# Altium PCB Sinalização.PcbDoc
Units mm, origin at the board's own origin, x right, y up, seen from the top; angles counter-clockwise.
Board outline 60.07 x 120.27 mm, 2 copper layers (Top Layer, Bottom Layer); 21 components, 23 nets, 104 pads, 4 vias.
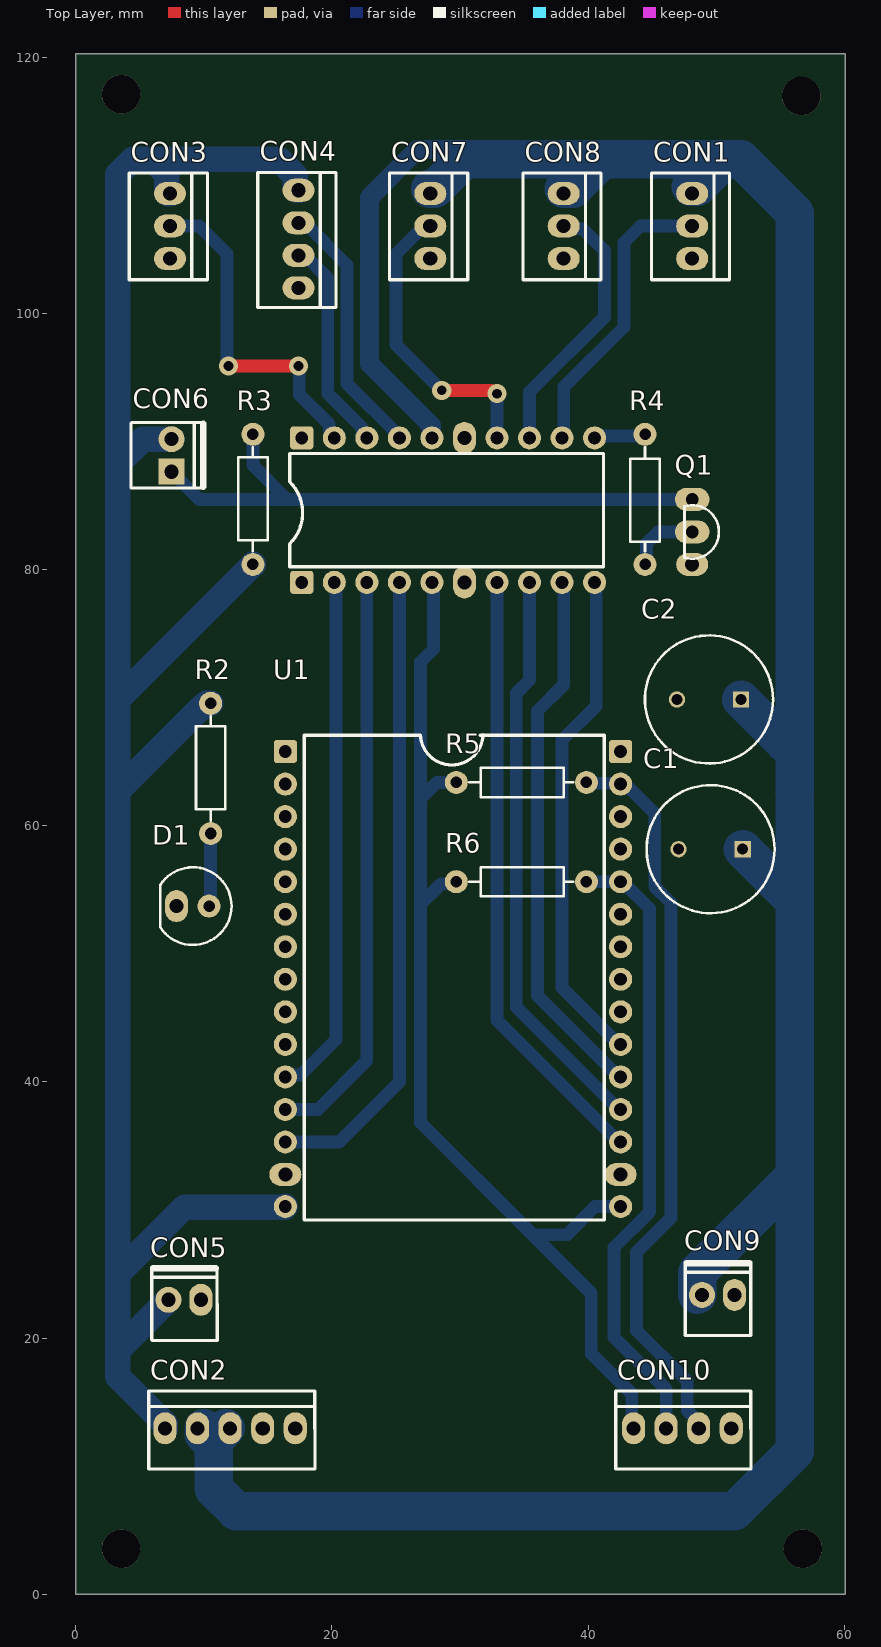
[diagram p0: Top Layer view]
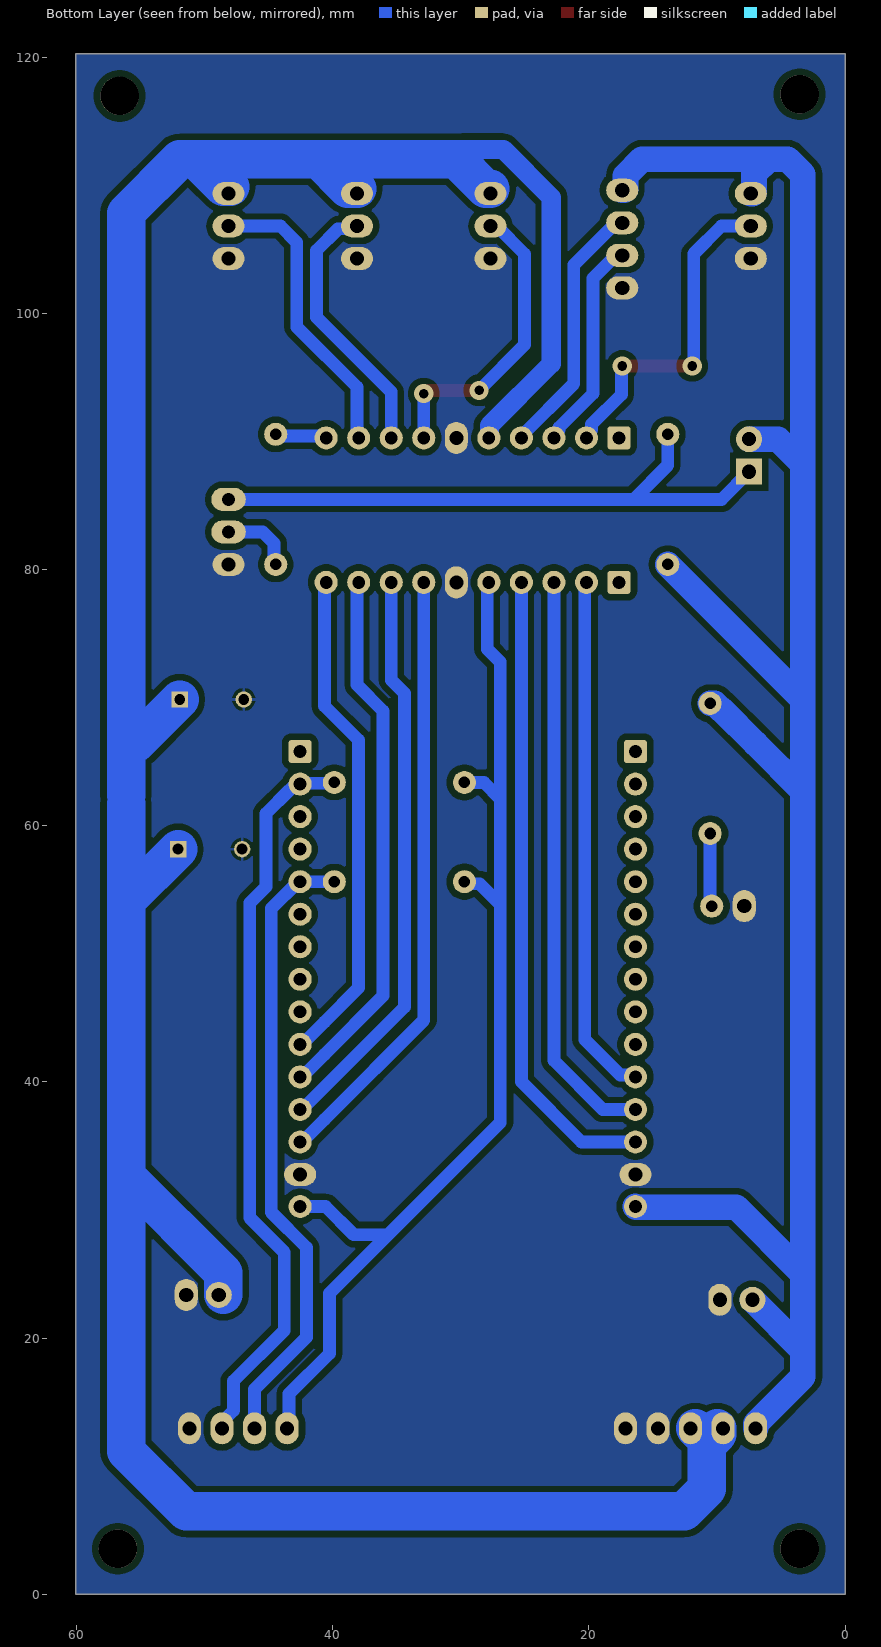
[diagram p1: Bottom Layer view, seen from below]

## Layer stack, top to bottom
Top Solder: solder mask 0.0102, Solder Resist, Dk 3.5
Top Layer: signal copper 0.0356
Dielectric 1: dielectric 0.32, FR-4, Dk 4.8
Bottom Layer: signal copper 0.0356
Bottom Solder: solder mask 0.0102, Solder Resist, Dk 3.5

## Board outline
0,0 60.071,0 60.071,120.269 0,120.269

## Design rules (kind name [scope] priority, off if disabled: settings)
Clearance [All] p1: gap=0.5 ignorepadtopadclearanceinfootprint=FALSE except(0: Arc-Text Arc-Hole Track-Text Track-Hole SMDPad-Text SMDPad-Hole THPad-Text THPad-Hole Via-Text Via-Hole Fill-Text Fill-Hole Poly-Text Poly-Hole Region-Text Region-Hole Text-Text Text-Hole)
ComponentClearance [All] p1: gap=0.3 collisioncheckmode=3 verticalgap=0.254 showdistances=FALSE
HoleSize [All] p1: absolutevalues=TRUE maxlimit=3 minlimit=0.75 maxpercent=80.000 minpercent=20.000
HoleToHoleClearance [All] p1: gap=0.1 allowstackedmicrovias=TRUE
MinimumSolderMaskSliver [All] p1: minsoldermaskwidth=0.05
PolygonConnect [All] p1: connectstyle=Relief reliefconductorwidth=0.254 reliefentries=4 polygonreliefangle="90 Angle" airgapwidth=0.254
RoutingVias [All] p1: holewidth=0.9 width=2 viastyle="Through Hole" minholewidth=0.9 minwidth=2 maxholewidth=0.9 maxwidth=2
SilkToSilkClearance [All] p1: silktosilkclearance=0
SilkToSolderMaskClearance [IsPad] p1: minsilkscreentomaskgap=0 clearancetoexposedcopper=TRUE
SolderMaskExpansion [All] p1: expansion=0.102 istentingtop=FALSE
Width [All] p1: maxlimit=3 minlimit=0.8 preferedwidth=1 minimp=50.000000 maximp=50.000000 favimp=50.000000
24 further rules are at their usual default settings.

## Components (designator, comment, footprint, x,y, rotation, side; value= is the part's Value field where it differs from the comment)
C1 "Cap. Elet. 470 uF 16V" "Cap. Elet. 470uF 16V" 52.07,58.166 r180 top
C2 "Cap. Elet. 470 uF 16V" "Cap. Elet. 470uF 16V" 51.943,69.85 r180 top
CON1 "KK_2.54_3vias" KK_3vias_180º 48.133,104.267 r90 top
CON2 "KK_2.54_5vias" KK_5vias_180° 17.145,12.954 r180 top
CON3 "KK_2.54_3vias" KK_3vias_180º 7.366,104.267 r90 top
CON4 "KK_2.54_4vias" KK_4vias_180° 17.399,101.981 r90 top
CON5 "KK_2.54_2vias" KK_2VIAS_180º#1 9.779,22.987 r180 top
CON6 "KK_2.54_2vias" KK_2VIAS_180º#2 7.493,87.63 r90 top
CON7 "KK_2.54_3vias" KK_3vias_180º 27.686,104.267 r90 top
CON8 "KK_2.54_3vias" KK_3vias_180º 38.1,104.267 r90 top
CON9 "KK_2.54_2vias" KK_2VIAS_180º#1 51.435,23.368 r180 top
CON10 "KK_2.54_4vias" KK_4vias_180° 51.181,12.954 r180 top
D1 "LED 5MM RED" "LED 5MM RED" 9.144,53.721 r180 top
Q1 "BC549" TO92 48.133,82.931 r270 top
R2 "RES 470R 1/4W CARBON FILM" "RES 470R 1/4W CARBON FILM" 10.541,64.467 r90 top
R3 "RES 1/4W CARBON FILM" "RES 10K 1/4W CARBON FILM" 13.843,85.471 r90 top
R4 "RES 1/4W CARBON FILM" "RES 10K 1/4W CARBON FILM" 44.45,85.471 r270 top
R5 "4.7K" "RES 4.7K 1/4W CARBON FILM" 34.798,63.373 r0 top
R6 "4.7K" "RES 4.7K 1/4W CARBON FILM" 34.798,55.626 r0 top
U1 "microcontrolador" ESP32_Desvikit_v1 16.37,65.786 r0 top value="ESP32 Desvikit V1"
? "Conversor de nível logico" "Conversor de nível lógico" 17.653,79.019 r90 top

## Footprints (in the part's own frame and the unit in brackets; to place one, negate y for a bottom-side part, rotate by r counter-clockwise, add the part's x,y. Pads: shape width x height; smd on the part's side, far side on the other; paste and mask are expansions set on the pad)
"Cap. Elet. 470uF 16V" [mm]
  rect 1.275x1.275 hole 0.85: 1(0,0)
  round 1.275 hole 0.85: 2(5,0)
  silkscreen extent -2.5,-5 7.5,5, body extent -2.75,-5.25 7.75,5.25, height 13
"Conversor de nível lógico" [mm] "3V3 para 5V"
  rrect25% 1.8x1.8 hole 1: 1(-0.025,0) 11(11.25,0)
  round 1.8 hole 1: 2(-0.025,-2.54) 3(-0.025,-5.08) 4(-0.025,-7.62) 5(-0.025,-10.16) 7(-0.025,-15.24) 8(-0.025,-17.78) 9(-0.025,-20.32) 10(-0.025,-22.86) 12(11.25,-2.54) 13(11.25,-5.08) 14(11.25,-7.62) 15(11.25,-10.16) 17(11.25,-15.24) 18(11.25,-17.78) 19(11.25,-20.32) 20(11.25,-22.86)
  oval 2.5x1.8 hole 1.1: 6(-0.025,-12.7) 16(11.25,-12.7)
  silkscreen extent 1.2,-23.56 10.03,0.94, body extent -1.25,-24.4 12.46,1.53, height 8.5
ESP32_Desvikit_v1 [mm]
  rrect25% 1.8x1.8 hole 1: 1(0,0) 30(26.175,0)
  round 1.8 hole 1: 2(0,-2.54) 3(0,-5.08) 4(0,-7.62) 5(0,-10.16) 6(0,-12.7) 7(0,-15.24) 8(0,-17.78) 9(0,-20.32) 10(0,-22.86) 11(0,-25.4) 12(0,-27.94) 13(0,-30.48) 15(0,-35.52) 16(26.175,-35.52) 18(26.175,-30.48) 19(26.175,-27.94) 20(26.175,-25.4) 21(26.175,-22.86) 22(26.175,-20.32) 23(26.175,-17.78) 24(26.175,-15.24) 25(26.175,-12.7) 26(26.175,-10.16) 27(26.175,-7.62) 28(26.175,-5.08) 29(26.175,-2.54)
  oval 2.5x1.8 hole 1.1: 14(0,-33.02) 17(26.175,-33.02)
  silkscreen extent 1.47,-36.57 24.9,1.31, body extent -1.2,-46.07 27.48,4.86, height 16.2
KK_2VIAS_180º#1 [mm]
  oval 1.8x2.5 hole 1.1: 1(0,0)
  round 2.032 hole 1.1: 2(2.54,0)
  silkscreen extent -1.27,-2.56 3.84,3.18, body extent -1.56,-2.75 4.19,3.25, height 11.79
KK_2VIAS_180º#2 [mm]
  rect 2.032x2.032 hole 1.1: 1(0,0)
  round 2.032 hole 1.1: 2(2.54,0)
  silkscreen extent -1.27,-2.56 3.84,3.18, body extent -1.56,-2.75 4.19,3.25, height 11.79
KK_3vias_180º [mm]
  oval 1.8x2.5 hole 1.1: 1(0,0) 2(2.54,0) 3(5.08,0)
  silkscreen extent -1.65,-2.92 6.69,3.18, body extent -1.6,-2.95 6.69,3.05, height 11.9
KK_4vias_180° [mm]
  oval 1.8x2.5 hole 1.1: 1(0,0) 2(2.54,0) 3(5.08,0) 4(7.62,0)
  silkscreen extent -1.53,-2.92 9.02,3.18, body extent -1.4,-2.79 8.76,3.01, height 10.12
KK_5vias_180° [mm]
  oval 1.8x2.5 hole 1.1: 1(0,0) 2(2.54,0) 3(5.08,0) 4(7.62,0) 5(10.16,0)
  silkscreen extent -1.53,-2.92 11.43,3.18, body extent -1.4,-2.79 11.3,3.01, height 10.12
"LED 5MM RED" [mm]
  round 1.8 hole 0.9: 1(-1.27,0)
  oval 1.8x2.5 hole 1.1: 2(1.27,0)
  silkscreen extent -3.03,-3.03 2.54,3.03, body extent -2.98,-3.01 2.44,3.01, height 9.31
"RES 4.7K 1/4W CARBON FILM" [mm]
  round 1.8 hole 0.9: 1(-5.08,0) 2(5.08,0)
  silkscreen extent -4.06,-1.14 4.06,1.14, body extent -5.47,-1.27 5.47,1.27, height 3.27
"RES 10K 1/4W CARBON FILM" [mm]
  round 1.8 hole 0.9: 1(-5.08,0) 2(5.08,0)
  silkscreen extent -4.06,-1.14 4.06,1.14, body extent -5.47,-1.27 5.47,1.27, height 3.27
"RES 470R 1/4W CARBON FILM" [mm]
  round 1.8 hole 0.9: 1(-5.08,0) 2(5.08,0)
  silkscreen extent -4.06,-1.14 4.06,1.14, body extent -5.47,-1.27 5.47,1.27, height 3.27
TO92 [mm]
  oval 1.8x2.7 hole 1: 1(-2.54,0) 2(0,0)
  oval 1.8x2.5 hole 1.1: 3(2.54,0)
  silkscreen extent -2.09,-0.6 2.09,2.08, body extent -2.74,-0.57 2.74,2.04, height 6.83

## Part data
C1 C2: "Aluminum Organic Polymer Capacitors 16volts 470uF ESR 10mohm", Arrow Part Number=16SEPC470M, Manufacturer_Name=Panasonic, Mouser Part Number=667-16SEPC470M, Arrow Price/Stock=https://www.arrow.com/en/products/16sepc470m/panasonic, Datasheet Link=http://industrial.panasonic.com/www-cgi/jvcr13pz.cgi?E+CI+4+AAB8010+16SEPC470M+8+WW, Height=13mm, Manufacturer_Part_Number=16SEPC470M, Mouser Price/Stock=https://www.mouser.co.uk/ProductDetail/Panasonic/16SEPC470M?qs=OE1iw1LrrPEdZuWyF2l%252B5w%3D%3D
CON1 CON3 CON7 CON8: "Conector KK 2.54mm 3 vias", Descrição="Conector KK 3 vias com passo 2.54mm", Encapsulamento="PTH - 180º", Modelo="3 vias - 180º", Valor="KK 3 vias 180º"
CON2: "Conector KK 2.54mm 5 vias", Descrição="Conector KK 3 vias com passo 2.54mm", Encapsulamento="PTH - 180º", Modelo="3 vias - 180º", Valor="KK 5 vias 180º"
CON4 CON10: "Conector KK 2.54mm 4 vias", Descrição="Conector KK 3 vias com passo 2.54mm", Encapsulamento="PTH - 180º", Modelo="3 vias - 180º", Valor="KK 4 vias 180º"
CON5 CON6 CON9: "Conector KK 2.54mm 2 vias", Descrição="Conector KK 3 vias com passo 2.54mm", Encapsulamento="PTH - 180º", Modelo="2 vias - 180º", Valor="KK 2 vias 180º"
D1: Current If Luminous Intensity=2, Forward Current If=20, Forward Voltage VF Max=2.5, LED Colour=Red, Manufacturer=Paralight, Manufacturer Part Number=IMP585, Operating Temperature Max=85, Operating Temperature Min=-40, Operating Temperature Range="-40°C to +85", Peak Forward Current=7, Supplier Part Number 1="Led 3mm Vermelho Difuso L-314HD - Paralight", Voltage Vf Typ="2.2V<!--FANDB--><div class=\"features-and-benefits-container\"><div class=\"features-and-benefits-description\"><span class=\"features-benefits-value\">The L-934LID from Kingbright is a through hole round shape high efficiency red colour LED. The device is made of gallium arsenide phosphide on gallium phosphide orange light emitting diode. This LED is widely used because of low power consumption, long life and solid state reliability.</span></div><div class=\"features-and-benefits-list\"><ul class=\"features-and-benefits-list-list\"><li class=\"features-and-benefits-list-item\">Standard bulb size of T-1 (3mm)</li><li class=\"features-and-benefits-list-item\">Reliable and rugged</li><li class=\"features-and-benefits-list-item\">Viewing angle is 60°</li><li class=\"features-and-benefits-list-item\">Luminous intensity of 3mcd at 2mA</li><li class=\"features-and-benefits-list-item\">Forward voltage is 2.0V</li><li class=\"features-and-benefits-list-item\">Forward current (If) is 20mA</li><li class=\"features-and-benefits-list-item\">Dominant wavelength is 625nm at IF=20mA</li><li class=\"features-and-benefits-list-item\">Peak wavelength is 627nm at IF=20", Bulb Size=3mm, ComponentLink1Description=http://loja.multcomercial.com.br/led-3mm-vermelho-difuso-l-314hd-paralight.html, ComponentLink1URL=http://loja.multcomercial.com.br/led-3mm-vermelho-difuso-l-314hd-paralight.html, Dominant Wavelength=625, External Diameter=2.9, External Length / Height=4.6, Forward Current If Max=20, Forward Voltage=2, Lead Cross-section Depth=0.5, Lead Cross-section Width=0.5, Lead Spacing=2.54, LED / Lamp Size="3mm / T-1", LED Mounting="Through Hole", LED Type=Standard, Lens Shape=Round, Luminous Intensity=3, Luminous Intensity @ If Min=0.7, Luminous Intensity Typ=3, Mounting Type="PCB Through Hole", MSL=-, No. of Pins=2, Packaging=Each, Peak Wavelength=625, PIV Max=5, Pricing 1="1=0.15 (BRL)", RoHS=YES, Stock 1=35260, Supplier 1="Mult Comercial", SVHC="No SVHC (15-Jun-2015)", Viewing Angle=60°, Wavelength Typ=625
Q1: "TRANS NPN 30V 0.1A TO-92", Collector- Base Voltage VCBO="30 V", Collector-Emitter Saturation Voltage="200 mV", DC Current Gain hFE Max=800, Emitter- Base Voltage VEBO="5 V", Manufacturer="Fairchild Semiconductor", Maximum DC Collector Current="0.1 A", Maximum Operating Temperature="+ 150 C", Maximum Power Dissipation="0.5 W", Minimum Operating Temperature="- 65 C", Package / Case=TO-92-3, Supplier Part Number 1=512-BC549, Brand="Fairchild Semiconductor", Collector- Emitter Voltage VCEO Max="30 V", ComponentLink1Description=https://datasheet.ciiva.com/982/bc546-982130.pdf, ComponentLink1URL=https://datasheet.ciiva.com/982/bc546-982130.pdf, ComponentLink2Description=https://datasheet.ciiva.com/17179/bc549-17179663.pdf, ComponentLink2URL=https://datasheet.ciiva.com/17179/bc549-17179663.pdf, Configuration=Single, DC Collector/Base Gain hfe Min=110, Factory Pack Quantity=2000, Gain Bandwidth Product fT="300 MHz", Manufacturer Part Number=BC549, Mounting Style="Through Hole", Packaging=Bulk, Product Category="Bipolar Transistors - BJT", RoHS=Details, Series=BC549, Supplier 1=Mouser, Transistor Polarity=NPN
R2: "RES 470R OHM 1/4W 5% CARBON FILM", Manufacturer=Ty-Ohm, Manufacturer Part Number=CR25, Operating Temperature="-55°C ~ 155°C", Package / Case=Axial, Power (Watts)="0.25W, 1/4W", Resistance (Ohms)=910R, Supplier Part Number 1="Resistor de Filme de Carbono 1/4 de Watt CR25 5% de tolerância - 0.22R Ω à 10M Ω", Temperature Coefficient="0/ -500ppm/°C", Tolerance=±5%, Category=Resistors, ComponentLink1Description=http://loja.multcomercial.com.br/resistor-de-1-4-de-watt-cr25-5-de-tolerancia.html, ComponentLink1URL=http://loja.multcomercial.com.br/resistor-de-1-4-de-watt-cr25-5-de-tolerancia.html, Composition="Carbon Film", Features="Flame Retardant Coating, Safety", Height=-, Number of Terminations=2, Packaging="Cut Tape (CT)", Pricing 1="1=0.20 (BRL)", RoHS="RoHS Compliant", Size / Dimension="0.091\" Dia x 0.256\" L (2.30mm x 6.50mm)", Stock 1=617543, Supplier 1="Mult Comercial", Supplier Device Package=Axial
R3 R4: "RES ? OHM 1/4W 5% CARBON FILM", Manufacturer=Ty-Ohm, Manufacturer Part Number=CR25, Operating Temperature="-55°C ~ 155°C", Package / Case=Axial, Power (Watts)="0.25W, 1/4W", Resistance (Ohms)=?, Supplier Part Number 1="Resistor de Filme de Carbono 1/4 de Watt CR25 5% de tolerância - 0.22R Ω à 10M Ω", Temperature Coefficient="0/ -500ppm/°C", Tolerance=±5%, Category=Resistors, ComponentLink1Description=http://loja.multcomercial.com.br/resistor-de-1-4-de-watt-cr25-5-de-tolerancia.html, ComponentLink1URL=http://loja.multcomercial.com.br/resistor-de-1-4-de-watt-cr25-5-de-tolerancia.html, Composition="Carbon Film", Features="Flame Retardant Coating, Safety", Height=-, Number of Terminations=2, Packaging="Cut Tape (CT)", Pricing 1="1=0.20 (BRL)", RoHS="RoHS Compliant", Size / Dimension="0.091\" Dia x 0.256\" L (2.30mm x 6.50mm)", Stock 1=617543, Supplier 1="Mult Comercial", Supplier Device Package=Axial
R5 R6: library part "RES 4.7K 1/4W CARBON FILM", "RES 4.7K OHM 1/4W 5% CARBON FILM", Manufacturer=Ty-Ohm, Manufacturer Part Number=CR25, Operating Temperature="-55°C ~ 155°C", Package / Case=Axial, Power (Watts)="0.25W, 1/4W", Resistance (Ohms)=?, Supplier Part Number 1="Resistor de Filme de Carbono 1/4 de Watt CR25 5% de tolerância - 0.22R Ω à 10M Ω", Temperature Coefficient="0/ -500ppm/°C", Tolerance=±5%, Category=Resistors, ComponentLink1Description=http://loja.multcomercial.com.br/resistor-de-1-4-de-watt-cr25-5-de-tolerancia.html, ComponentLink1URL=http://loja.multcomercial.com.br/resistor-de-1-4-de-watt-cr25-5-de-tolerancia.html, Composition="Carbon Film", Features="Flame Retardant Coating, Safety", Height=-, Number of Terminations=2, Packaging="Cut Tape (CT)", Pricing 1="1=0.20 (BRL)", RoHS="RoHS Compliant", Size / Dimension="0.091\" Dia x 0.256\" L (2.30mm x 6.50mm)", Stock 1=617543, Supplier 1="Mult Comercial", Supplier Device Package=Axial
U1: library part "ESP32 Desvikit v1", "microcontrolador com moculo bluethoth e wifi"

## Free pads (board coordinates)
  round 3 hole 3: 6(3.556,117.094) 6(56.642,116.967) 7(56.769,3.556) 8(3.556,3.556)

## Via types
v1: diameter 1.5, hole 0.75, Top Layer to Bottom Layer, 4 vias

## Nets (pads, with @x,y where several pads share a name; then routed paths per layer and width w, separated by ;. In a path a pad name is that pad's centre, name@x,y a point inside that pad or via, vN(x,y) a via of type N, cw(c..) or ccw(c..) an arc to the next point about the centre after c; other vN are vias at no path point)
3V3: ?.5 CON10.4 R5.1 R6.1 U1.16 | length 88
  Bottom Layer w1: ?.5 27.94,78.867 27.94,73.787 26.924,72.771 26.924,62.103 ; R6.1 29.559,55.467 28.543,55.467 26.924,53.848 ; R5.1 28.194,63.373 26.924,62.103 ; U1.16 40.553,30.266 38.354,28.067 35.687,28.067 ; CON10.4 43.408,13.107 43.408,15.647 40.259,18.796 40.259,23.495 35.687,28.067 ; 26.924,53.848 26.924,36.83 35.687,28.067 ; 26.924,53.848 26.924,62.103
+5: ?.15 C1.1 C2.1 CON1.3 CON2.3 CON2.4 CON7.3 CON8.3 CON9.2 | length 242.4
  Bottom Layer w1.5: ?.15@27.756,90.326 27.756,91.243 22.935,96.064 22.935,109.041 26.67,112.776 29.941,112.776 30.703,112.014
  Bottom Layer w3: CON2.4@9.985,12.954 9.985,12.494 10.795,11.684 10.795,8.234 12.552,6.477 51.435,6.477 56.134,11.176 56.134,32.693 ; CON2.3@11.245,12.494 CON2.3@11.705,12.954 ; CON7.3@27.686,109.707 28.046,109.707 30.353,112.014 30.703,112.014 41.117,112.014 ; CON8.3@38.1,109.728 38.831,109.728 41.117,112.014 ; CON1.3@48.006,109.874 48.54,109.874 50.292,111.626 50.292,112.014 ; CON9.2@48.535,23.368 48.535,25.094 56.134,32.693 ; C2.1 55.372,66.421 56.134,66.421 ; C1.1 56.134,54.102 ; 56.134,61.722 56.134,54.102 ; 56.134,62.357 56.134,66.421 ; 41.117,112.014 50.292,112.014 ; 50.292,112.014 51.943,112.014 56.134,107.823 56.134,66.421 ; 56.134,32.693 56.134,54.102
+12: CON2.5 CON3.3 CON4.4 CON5.2 CON6.2 R2.2 R3.1 U1.15 | length 169.7
  Bottom Layer w2: CON2.5 6.985,13.304 3.302,16.987 3.302,19.05 ; CON5.2 3.302,19.05 ; CON3.3 7.216,109.347 7.116,109.447 7.116,110.867 5.969,112.014 ; CON6.2 7.487,90.164 5.239,90.164 3.302,88.227 ; R2.2 10.189,69.547 9.73,69.087 9.667,69.087 6.993,66.413 3.302,62.722 ; R3.1 3.302,69.85 ; U1.15 16.33,30.226 8.509,30.226 3.302,25.019 ; CON4.4 17.249,109.601 17.149,109.701 17.149,110.742 15.877,112.014 5.969,112.014 ; 3.302,19.05 3.302,25.019 ; 3.302,25.019 3.302,62.722 ; 3.302,62.722 3.302,69.85 ; 3.302,69.85 3.302,88.227 ; 3.302,88.227 3.302,110.842 4.474,112.014 5.969,112.014
Buzzer_3V3: ?.10 U1.21 | length 39.2
  Bottom Layer w1: ?.10 40.64,78.867 40.64,69.342 37.978,66.68 37.978,47.346 40.645,44.679 42.398,42.926 U1.21
Buzzer_5V: ?.20 R4.1 | length 4.1
  Bottom Layer w1: ?.20 40.654,90.41 44.309,90.41 R4.1
Camêra_3V3: ?.2 U1.11 | length 40.9
  Bottom Layer w1: U1.11 16.523,40.539 17.552,40.539 20.32,43.307 20.32,78.867 ?.2
Camêra_5V: ?.12 CON3.2 | length 26.4
  Top Layer w1: v1(11.938,95.885) v1(17.399,95.885)
  Bottom Layer w1: CON3.2 9.652,106.807 11.811,104.648 11.811,96.366 11.842,96.334 11.842,95.981 v1(11.938,95.885) ; v1(17.399,95.885) 17.462,95.822 17.462,93.663 19.793,91.332 19.793,90.885 20.193,90.485 ?.12
"Dado1 Led_3V3": ?.9 U1.20 | length 42.3
  Bottom Layer w1: ?.9 38.1,78.867 38.1,70.993 36.068,68.961 36.068,46.716 40.645,42.139 42.398,40.386 U1.20
"Dado1 Led_5V": ?.19 CON1.2 | length 23.3
  Bottom Layer w1: ?.19 38.1,90.396 38.1,94.234 42.803,98.937 42.803,105.522 44.088,106.807 CON1.2 CON1.2@47.98,106.654
"Dado2 Led_3V3": ?.8 U1.19 | length 45
  Bottom Layer w1: ?.8 35.433,71.374 34.393,70.334 34.393,45.851 42.398,37.846 U1.19
"Dado2 Led_5V": ?.18 CON8.2 | length 21
  Bottom Layer w1: ?.18 35.433,93.853 41.275,99.695 41.275,104.902 39.577,106.6 38.307,106.6 CON8.2
"Dado3 Led_3V3": ?.7 U1.18 | length 47.8
  Bottom Layer w1: ?.7 32.893,44.811 40.645,37.059 42.398,35.306 U1.18
"Dado3 Led_5V": ?.17 CON7.2 | length 23.7
  Top Layer w1: v1(28.575,93.98) 32.504,93.98 32.758,93.726 v1(32.893,93.726)
  Bottom Layer w1: CON7.2 27.189,106.807 25.019,104.637 25.019,97.536 v1(28.575,93.98) ; ?.17 33.02,90.396 32.893,90.523 v1(32.893,93.726)
GND: ?.6 ?.16 C1.2 C2.2 CON1.1 CON2.1 CON2.2 CON3.1 CON4.1 CON5.1 CON7.1 CON8.1 CON9.1 CON10.1 D1.2 Q1.3 U1.14 U1.17
NetCON6_1: CON6.1 Q1.1 R3.2 | length 47.7
  Bottom Layer w1: CON6.1 9.652,85.471 16.501,85.471 ; R3.2 13.843,88.129 16.501,85.471 ; Q1.1 16.501,85.471
NetD1_1: D1.1 R2.1 | length 5.7
  Bottom Layer w1: D1.1 10.541,53.848 R2.1
NetQ1_2: Q1.2 R4.2 | length 5.6
  Bottom Layer w1: R4.2 44.576,80.517 44.576,82.041 45.466,82.931 Q1.2
S_d_3V3: ?.4 U1.13 | length 49.8
  Bottom Layer w1: U1.13 20.574,35.306 25.273,40.005 ?.4
S_d_5V: ?.14 CON4.3 | length 20.3
  Bottom Layer w1: CON4.3 17.896,107.061 21.185,103.772 21.185,94.504 25.273,90.416 ?.14
S_e_3V3: ?.3 U1.12 | length 45.3
  Bottom Layer w1: U1.12 18.923,37.846 22.733,41.656 ?.3
S_e_5V: ?.13 CON4.2 | length 16.8
  Bottom Layer w1: CON4.2 17.896,104.521 19.685,102.732 19.685,93.726 22.333,91.078 22.333,90.885 22.733,90.485 ?.13
SCL: CON10.2 R5.2 U1.29 | length 58
  Bottom Layer w1: R5.2 39.942,63.309 42.481,63.309 U1.29 42.897,63.246 43.38,62.763 43.395,62.763 45.212,60.946 45.212,55.227 46.482,53.957 46.482,29.395 43.791,26.704 43.791,20.598 47.752,16.637 47.752,14.34 48.641,13.451 CON10.2
SDA: CON10.3 R6.2 U1.26 | length 49.3
  Top Layer w0.5: U1.26@42.482,55.563 U1.26
  Bottom Layer w1: R6.2 42.692,55.626 44.795,53.523 44.795,29.829 42.037,27.071 42.037,20.066 46.101,16.002 CON10.3
pads on no net: ?.1 ?.11 U1.1 U1.2 U1.3 U1.4 U1.5 U1.6 U1.7 U1.8 U1.9 U1.10 U1.22 U1.23 U1.24 U1.25 U1.27 U1.28 U1.30

## Polygon pours and split planes (outlines as drawn)
GND on Bottom Layer "GND_L02_P000" (solid, pour order 0): 0,-0.127 0.127,0 60.071,0 60.071,120.269 0,120.269

## Text inside footprints (layer, text, board x,y; h text height)
D1: Mechanical 29 "K" at 8.509,55.245 h0.5 r180; Mechanical 29 "A" at 10.287,55.245 h0.5 r180
Q1: Mechanical 29 "1" at 49.533,86.131 h0.5 r270
R2: Mechanical 29 "1" at 11.557,60.53 h0.5 r90
R3: Mechanical 29 "1" at 14.859,81.534 h0.5 r90
R4: Mechanical 29 "1" at 43.434,89.408 h0.5 r270
R5: Mechanical 29 "1" at 30.861,62.357 h0.5
R6: Mechanical 29 "1" at 30.861,54.61 h0.5